# EAGLE board schematic (EAGLE 9.2.0)
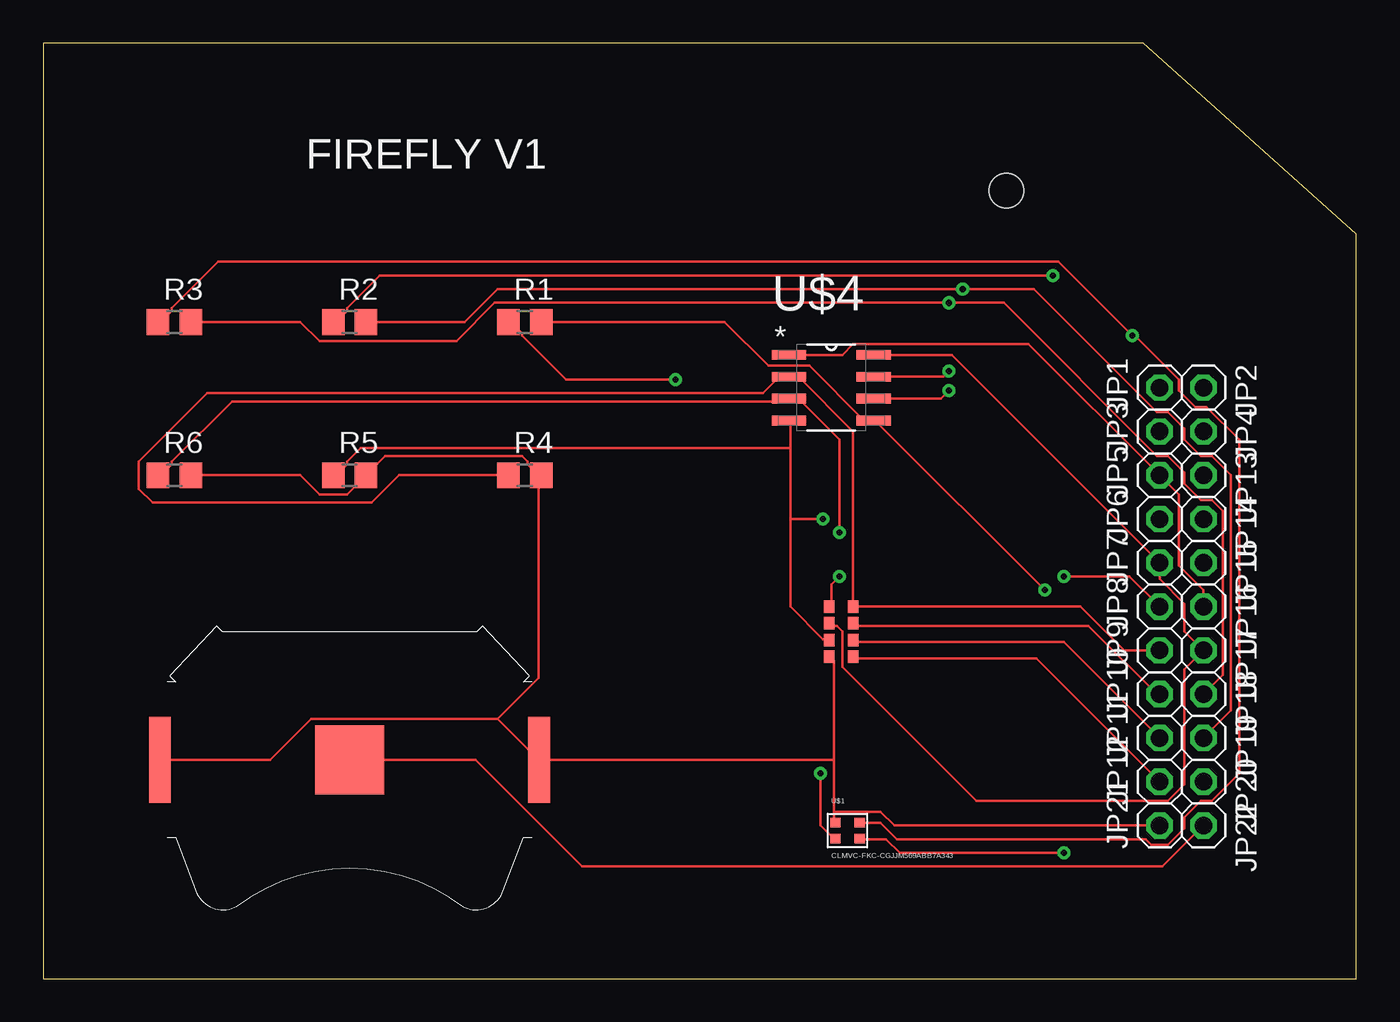
[diagram p0: board, top side]
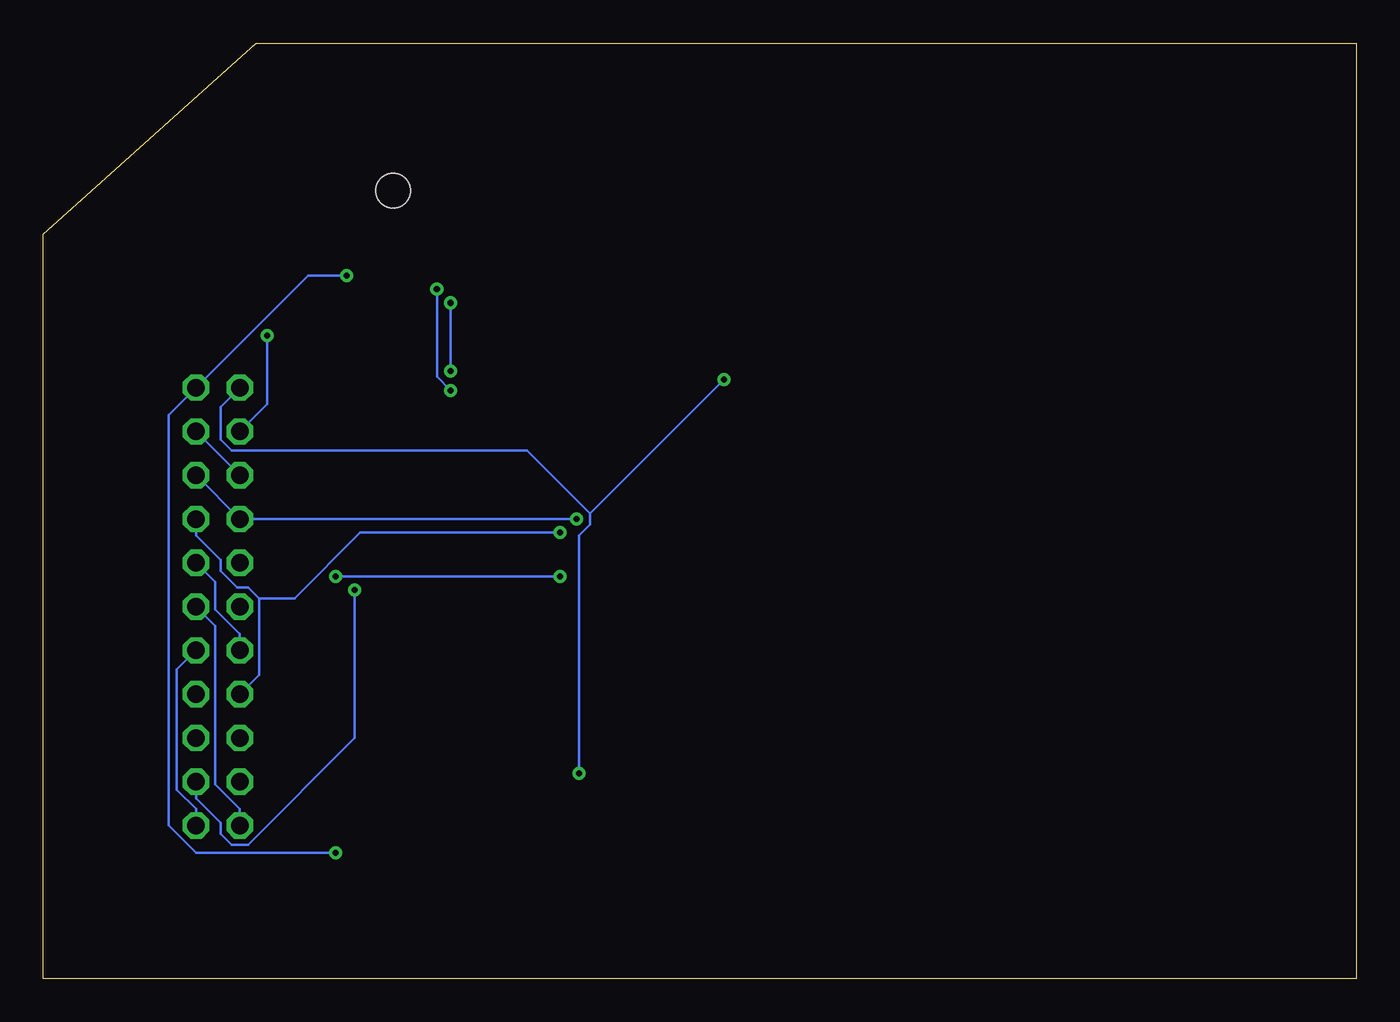
[diagram p1: board, bottom side, seen from below]

Size 76.18 x 54.28 mm. Coordinates in mm from the lower left corner, seen from the top.
Outline: 0,0 76.18,0 76.18,43.2 63.83,54.28 0,54.28 0,0
Copper layers (1*16): Top 0.035mm / dielectric 1.5mm / Bottom 0.035mm
Design rules "default": minimum track width 6mil, minimum drill 0.35mm, track to track 6mil, track to pad 6mil, pad to pad 6mil, via to via 6mil, smd to smd 6mil, copper to edge 40mil, drill to drill 6mil, minimum pad ring 10mil, minimum via ring 8mil, stop-mask expansion 4mil, vias tented up to drill 0mil, thermal gap 10mil
Net classes: 0 default: width 0.127 mm, clearance 0.254 mm
Holes 2 mm at 55.88,45.72
vRestrict: area 39.4,27.9 to 52.1,40.6; area 43.2,16.5 to 49.5,22.9; area 44.5,6.4 to 49.5,11.4; area 59.7,5.1 to 71.1,36.8; area 2.5,25.4 to 33,40.6; area 3.8,8.9 to 33,16.5

## Footprints (pad centres in the part's own frame; a part is rotated, then mirrored left to right if it is on the bottom)
1X01 = drill 1.016 octagon: 1 0,0
R0805 = smd 1.3 x 1.5: 1 -0.95,0; 2 0.95,0
CLMVC-FKC-CGJJM569ABB7A343 = smd 0.6 x 0.55: P$1 0.24,0.5; P$2 0.24,1.45; P$3 1.64,1.45; P$4 1.64,0.5
LTR-559ALS-01 = smd 0.6 x 0.72: P$1 0,0; P$2 0,-0.97; P$3 0,-1.94; P$4 0,-2.91; P$5 -1.4,0; P$6 -1.4,-0.97; P$7 -1.4,-1.94; P$8 -1.4,-2.91
3034_C = smd 1.27 x 5: P$1 11,0; P$2 -11,0 | smd 4 x 4: P$3 0,0
SOIC127P600X175-8N = smd 1.981 x 0.559: 1 -2.464,1.905; 2 -2.464,0.635; 3 -2.464,-0.635; 4 -2.464,-1.905; 5 2.464,-1.905; 6 2.464,-0.635; 7 2.464,0.635; 8 2.464,1.905

## Placement (x,y rotation side)
JP1  [1X01]  64.77,34.29 90 top
JP2  [1X01]  67.31,34.29 270 top
JP3  [1X01]  64.77,31.75 90 top
JP4  [1X01]  67.31,31.75 270 top
JP5  [1X01]  64.77,29.21 90 top
JP6  [1X01]  64.77,26.67 90 top
JP7  [1X01]  64.77,24.13 90 top
JP8  [1X01]  64.77,21.59 90 top
JP9  [1X01]  64.77,19.05 90 top
JP10  [1X01]  64.77,16.51 90 top
JP11  [1X01]  64.77,13.97 90 top
JP12  [1X01]  64.77,11.43 90 top
JP13  [1X01]  67.31,29.21 270 top
JP14  [1X01]  67.31,26.67 270 top
JP15  [1X01]  67.31,24.13 270 top
JP16  [1X01]  67.31,21.59 270 top
JP17  [1X01]  67.31,19.05 270 top
JP18  [1X01]  67.31,16.51 270 top
JP19  [1X01]  67.31,13.97 270 top
JP20  [1X01]  67.31,11.43 270 top
JP21  [1X01]  64.77,8.89 90 top
JP22  [1X01]  67.31,8.89 270 top
R1  [R0805]  27.94,38.1 0 top
R2  [R0805]  17.78,38.1 0 top
R3  [R0805]  7.62,38.1 0 top
R4  [R0805]  27.94,29.21 0 top
R5  [R0805]  17.78,29.21 0 top
R6  [R0805]  7.62,29.21 0 top
U$1  CLMVC-FKC-CGJJM569ABB7A343  [CLMVC-FKC-CGJJM569ABB7A343]  45.72,7.62 0 top
U$2  LTR-559ALS-01  [LTR-559ALS-01]  46.99,21.59 0 top
U$3  COIN-BATTERY-HOLDER  [3034_C]  17.78,12.7 180 top
U$4  ATTINY402-SSNR  [SOIC127P600X175-8N]  45.72,34.29 0 top

## Library data of the parts
JP1-JP22 = pinhead
R1-R6 = rcl; SPICEPREFIX: R
U$1 = CLMVC-FKC-CGJJM569aBB7a343
U$2 = LTR-559ALS-01
U$3 = coin-battery-holder
U$4 = SOIC127P600X175-8N

## Nets
GND: JP7.1 JP17.1 JP22.1 U$2.P$6 U$3.P$3 U$4.8
N$1: JP3.1 R3.1 U$1.P$3
N$2: JP2.1 R2.1 U$1.P$4
N$3: JP1.1 R1.1 U$1.P$1
N$4: JP8.1 U$2.P$5
N$5: JP18.1 R3.2 U$4.7
N$6: JP19.1 R2.2 U$4.6
N$7: JP20.1 R1.2 U$4.5
N$8: JP9.1 JP15.1 R4.1 U$2.P$1 U$4.2
N$9: JP10.1 JP14.1 R6.1 U$2.P$2 U$4.3
N$10: JP6.1 JP13.1 R5.1 U$2.P$7 U$4.4
N$11: JP4.1 JP5.1 JP16.1 JP21.1 R4.2 R5.2 R6.2 U$1.P$2 U$2.P$8 U$3.P$1 U$3.P$2 U$4.1
N$15: JP11.1 U$2.P$3
N$16: JP12.1 U$2.P$4

## Tracks (layer width: path | path; a pad name or v marks a point on that pad's centre or on a via)
GND
  Top 0.152: U$4.8 52.7,36.2 JP7.1 64.77,23.18 66.2,21.75 66.2,20.16 JP17.1 66.2,17.94 66.2,11.27 65.25,10.32 54.13,10.32 46.35,18.1 46.35,20.16 46.04,20.48 45.72,20.48 U$2.P$6 | U$3.P$3 25.08,12.7 31.27,6.51 64.93,6.51 JP22.1
  Bottom 0.152: JP22.1 67.31,9.84 68.42,10.95 68.42,17.94 JP17.1
N$1  (via drill 0.35)
  Top 0.152: U$1.P$3 47.47,9.05 48.58,9.05 49.53,8.1 63.98,8.1 64.29,7.78 65.25,7.78 66.2,8.73 66.2,9.37 67.15,10.32 67.79,10.32 69.37,11.91 69.37,31.27 67.47,33.18 66.83,33.18 65.88,34.13 65.88,34.77 63.34,37.31 v63.18,37.31 58.9,41.59 10.16,41.59 7.46,38.89 7.46,38.73 6.83,38.1 R3.1
  Bottom 0.152: v63.18,37.31 63.18,33.34 JP3.1
N$2  (via drill 0.35)
  Top 0.152: v59.21,7.3 49.69,7.3 48.9,8.1 47.47,8.1 U$1.P$4 | v58.58,40.8 19.53,40.8 17.62,38.89 17.62,38.73 16.99,38.1 R2.1
  Bottom 0.152: v59.21,7.3 67.31,7.3 68.9,8.89 68.9,32.7 JP2.1 60.8,40.8 v58.58,40.8
N$3  (via drill 0.35)
  Top 0.152: v45.09,11.91 45.09,8.89 45.72,8.26 45.88,8.26 U$1.P$1 | v36.67,34.77 30.32,34.77 27.78,37.31 27.78,37.47 27.15,38.1 R1.1
  Bottom 0.152: v45.09,11.91 45.09,25.72 44.45,26.35 44.45,26.99 | 44.45,26.99 48.1,30.64 65.25,30.64 65.88,31.27 65.88,33.18 JP1.1 | 44.45,26.99 v36.67,34.77
N$4  (via drill 0.35)
  Top 0.152: v46.2,23.34 45.72,22.86 45.72,21.59 U$2.P$5 | v59.21,23.34 63.02,23.34 JP8.1
  Bottom 0.152: v59.21,23.34 v46.2,23.34
N$5  (via drill 0.35)
  Top 0.152: R3.2 14.92,38.1 16.03,36.99 23.97,36.99 26.19,39.21 v52.55,39.21 55.72,39.21 64.61,30.32 65.25,30.32 66.2,29.37 66.2,28.73 67.15,27.78 67.79,27.78 68.42,27.15 68.42,17.62 JP18.1 | U$4.7 52.23,34.92 v52.55,35.24
  Bottom 0.152: v52.55,39.21 v52.55,35.24
N$6  (via drill 0.35)
  Top 0.152: R2.2 24.45,38.1 26.35,40.01 v53.34,40.01 57.47,40.01 64.61,32.86 65.25,32.86 66.2,31.91 66.2,31.27 67.15,30.32 67.79,30.32 68.9,29.21 68.9,15.56 JP19.1 | U$4.6 52.07,33.66 v52.55,34.13
  Bottom 0.152: v52.55,34.13 53.34,34.92 v53.34,40.01
N$7  (via drill 0.35)
  Top 0.152: R1.2 39.53,38.1 42.07,35.56 44.45,35.56 47.62,32.38 U$4.5 48.26,32.38 v58.1,22.54
  Bottom 0.152: JP20.1 67.31,10.48 65.88,9.05 65.88,8.41 65.25,7.78 64.29,7.78 58.1,13.97 v58.1,22.54
N$8
  Top 0.152: R4.1 20.64,29.21 19.05,27.62 6.35,27.62 5.56,28.42 5.56,30 9.53,33.97 41.75,33.97 42.7,34.92 U$4.2 43.81,34.92 46.99,31.75 U$2.P$1 60.17,21.59 62.71,19.05 JP9.1
  Bottom 0.152: JP9.1 64.77,20 66.2,21.43 66.2,23.02 JP15.1
N$9  (via drill 0.35)
  Top 0.152: JP10.1 64.61,16.51 60.64,20.48 46.99,20.48 U$2.P$2 | R6.1 6.83,29.21 7.46,29.84 7.46,30 10.95,33.5 43.02,33.5 43.18,33.66 U$4.3 43.81,33.66 46.2,31.27 v46.2,25.88
  Bottom 0.152: JP14.1 67.31,25.72 65.88,24.29 65.88,23.65 64.93,22.7 64.29,22.7 63.66,22.07 | 63.66,22.07 63.66,17.62 JP10.1 | 63.66,22.07 61.59,22.07 57.78,25.88 v46.2,25.88
N$10  (via drill 0.35)
  Top 0.152: 43.34,30.8 43.34,32.38 U$4.4 | 43.34,30.8 43.34,26.67 | 43.34,26.67 43.34,21.59 45.24,19.68 45.56,19.68 U$2.P$7 | 43.34,30.8 18.41,30.8 17.62,30 17.62,29.84 16.99,29.21 R5.1 | 43.34,26.67 v45.24,26.67
  Bottom 0.152: JP13.1 JP6.1 v45.24,26.67
N$11
  Top 0.152: U$4.1 46.35,36.2 46.99,36.83 57.15,36.83 JP5.1 65.88,28.1 65.88,23.97 67.31,22.54 JP16.1 | R6.2 14.92,29.21 16.03,28.1 17.62,28.1 R5.2 | 28.73,29.21 28.1,29.84 28.1,30 27.78,30.32 19.84,30.32 R5.2 | R5.2 | 45.88,12.7 45.88,18.41 45.72,18.57 U$2.P$8 | 45.88,12.7 45.88,9.68 | 45.88,9.68 45.88,9.21 U$1.P$2 | 45.88,12.7 U$3.P$2 28.73,12.7 26.35,15.08 | U$3.P$1 13.18,12.7 15.56,15.08 26.35,15.08 | 28.73,29.21 28.73,17.46 26.35,15.08 | 28.73,29.21 R4.2 | JP21.1 49.37,8.89 48.58,9.68 45.88,9.68
  Bottom 0.152: JP21.1 64.77,9.84 66.2,11.27 66.2,20.48 JP16.1 | JP5.1 JP4.1
N$15
  Top 0.152: JP11.1 59.21,19.53 46.99,19.53 U$2.P$3
N$16
  Top 0.152: JP12.1 57.63,18.57 46.99,18.57 U$2.P$4

## Text on the board
tPlace: FIREFLY V1